# Altium PCB connectors.PcbDoc
Units mil, origin at the board's own origin, x right, y up, seen from the top; angles counter-clockwise.
Board outline 1165 x 1770 mil, 2 copper layers (Top Layer, Bottom Layer); 14 components, 5 nets, 28 pads, 0 vias.
Unrouted connection lines stored in the file: 11.
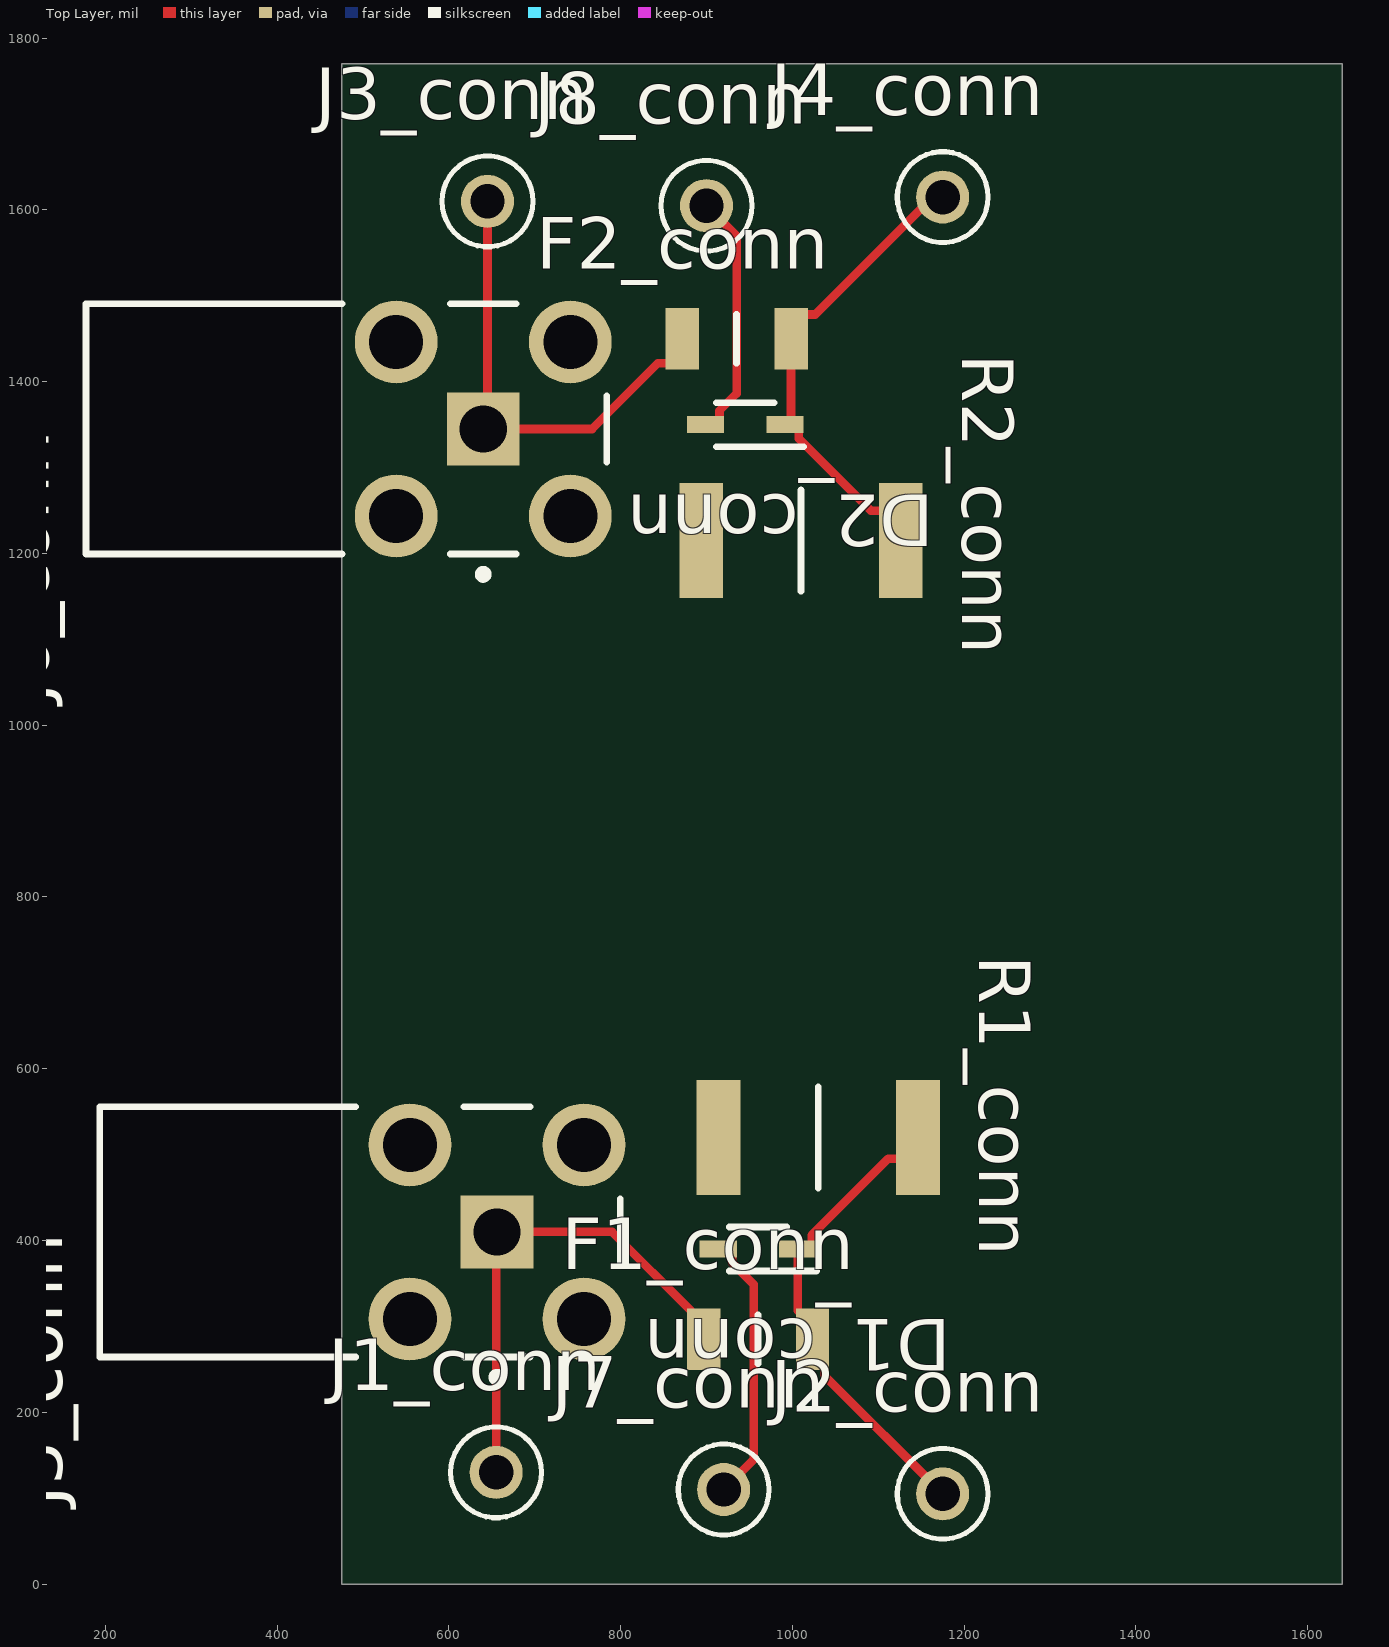
[diagram p0: Top Layer view]
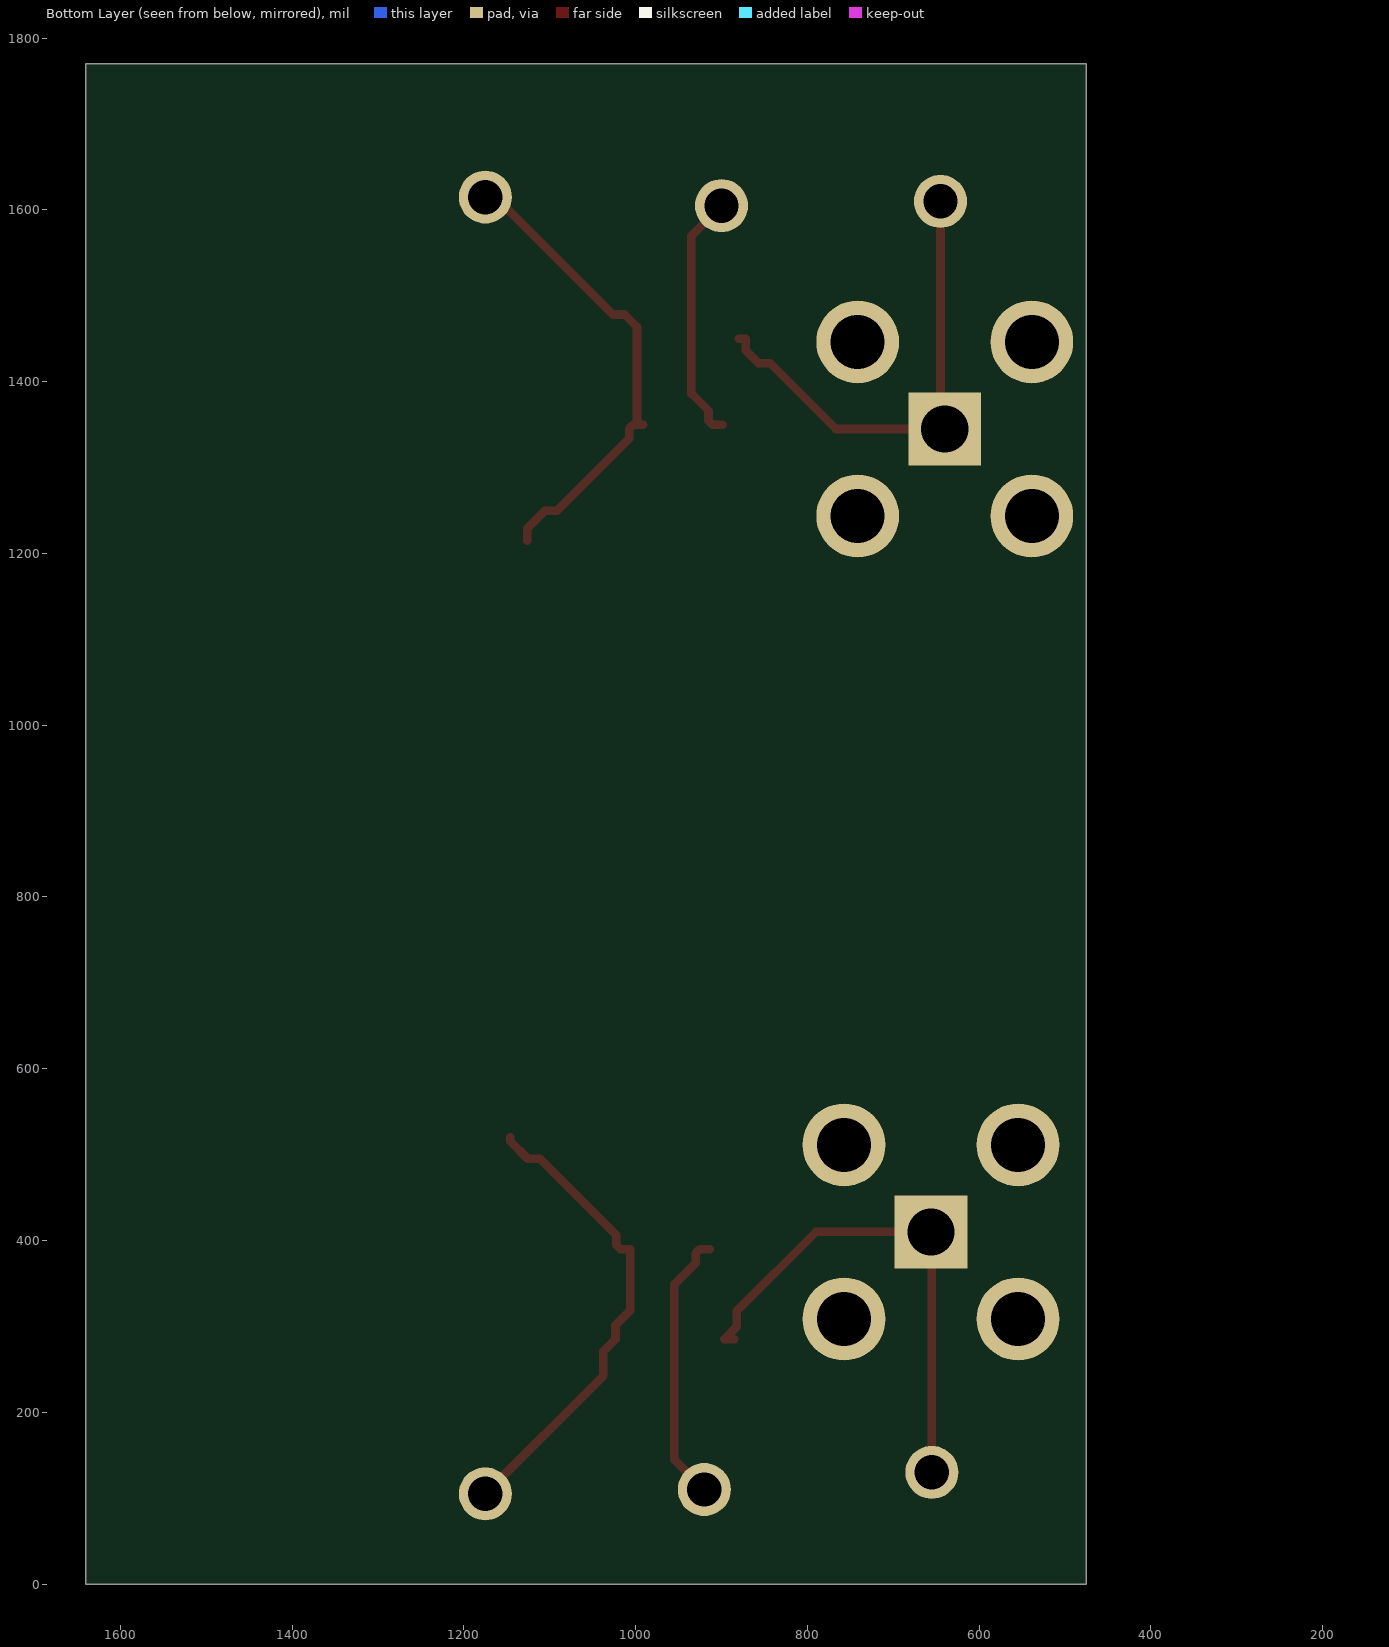
[diagram p1: Bottom Layer view, seen from below]
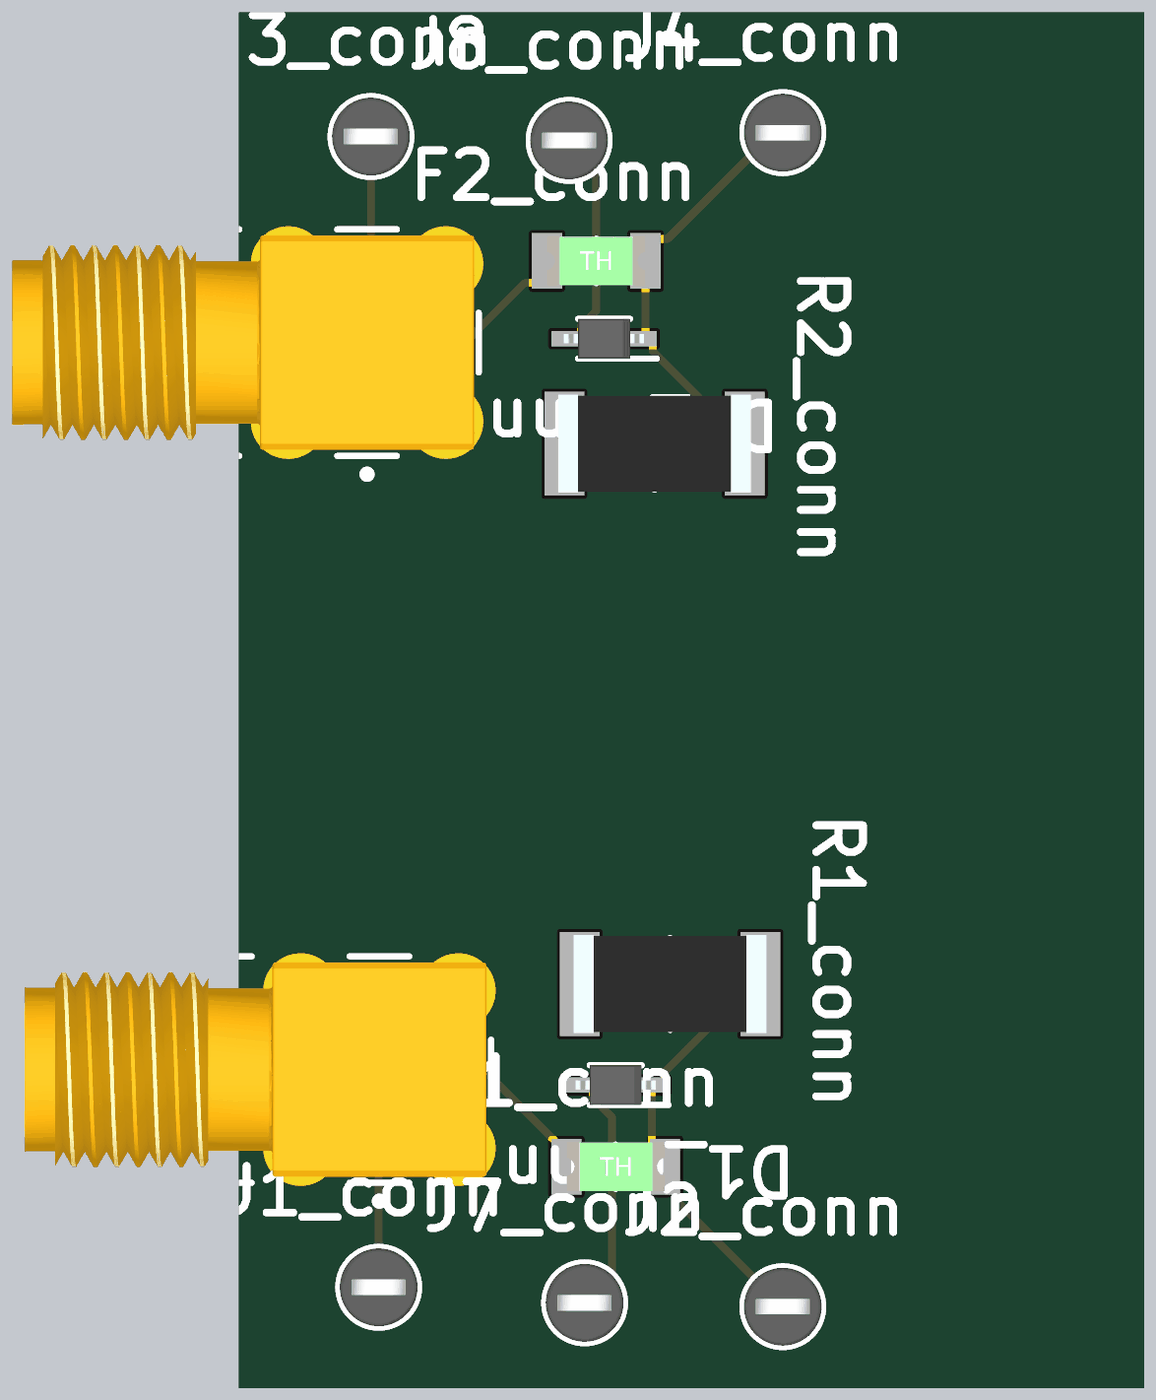
[diagram p2: 3D render of the assembled board from above, using the file's embedded part models]

## Layer stack, top to bottom
Top Solder: solder mask 0.4, Solder Resist, Dk 3.5
Top Layer: signal copper 1.4
Dielectric 1: dielectric 12.6, FR-4, Dk 4.8
Bottom Layer: signal copper 1.4
Bottom Solder: solder mask 0.4, Solder Resist, Dk 3.5

## Board outline
475,0 475,1770 1640,1770 1640,0

## Design rules (kind name [scope] priority, off if disabled: settings)
Clearance [All] p1: gap=10 ignorepadtopadclearanceinfootprint=FALSE except(0: Arc-Hole Track-Hole SMDPad-Hole THPad-Hole Via-Hole Fill-Hole Poly-Hole Region-Hole Text-Hole)
PolygonConnect [All] p1: connectstyle=Relief reliefconductorwidth=10 reliefentries=4 polygonreliefangle="90 Angle" airgapwidth=10
RoutingVias [All] p1: holewidth=28 width=50 viastyle="Through Hole" minholewidth=28 minwidth=50 maxholewidth=28 maxwidth=50
SolderMaskExpansion [All] p1: expansion=4 istentingtop=FALSE
Width [All] p1: maxlimit=10 minlimit=10 preferedwidth=10
30 further rules are at their usual default settings.

## Components (designator, comment, footprint, x,y, rotation, side; value= is the part's Value field where it differs from the comment)
D1_conn "AQW05C-01FTG" SOD2613X100N 960,390 r180 top
D2_conn "AQW05C-01FTG" SOD2613X100N 945,1350 r180 top
F1_conn "PTS120660V005" FUSC3216X90N 960,285 r0 top
F2_conn "PTS120660V005" FUSC3216X90N 935,1450 r0 top
J1_conn "5001" FP-5001-MFG 655,130 r0 top
J2_conn "5001" FP-5001-MFG 1175,105 r0 top
J3_conn "5001" FP-5001-MFG 645,1610 r0 top
J4_conn "5001" FP-5001-MFG 1175,1615 r0 top
J5_conn "PCB.SMAFRA.HT" FP-PCB_SMAFRA_HT-MFG 496.48,410 r90 top
J6_conn "PCB.SMAFRA.HT" FP-PCB_SMAFRA_HT-MFG 480.55,1345 r90 top
J7_conn "5001" FP-5001-MFG 920,110 r0 top
J8_conn "5001" FP-5001-MFG 900,1605 r0 top
R1_conn "50" RESC6332X65N 1030,520 r0 top
R2_conn "50" RESC6332X65N 1010,1215 r0 top

## Footprints (in the part's own frame and the unit in brackets; to place one, negate y for a bottom-side part, rotate by r counter-clockwise, add the part's x,y. Pads: shape width x height; smd on the part's side, far side on the other; paste and mask are expansions set on the pad)
FP-5001-MFG [mm]
  round 1.57 hole 1.016 paste-2539.97 mask+0: 1(0,0)
  silkscreen extent -1.35,-1.34 1.35,1.34, body extent -1.45,-1.45 1.45,1.45, height 0.25
FP-PCB_SMAFRA_HT-MFG [mm]
  rect 2.15x2.15 hole 1.4 paste-2539.97 mask+0: 1(0,-4.05)
  round 2.45 hole 1.6 paste-2539.97 mask+0: 2(-2.575,-1.475) 3(2.575,-1.475) 4(-2.575,-6.625) 5(2.575,-6.625)
  silkscreen extent -4.42,-7.7 3.7,7.7, body extent -3.9,-7.95 3.9,7.8, height 0.25
FUSC3216X90N [mm]
  rect 0.99x1.82 smd: 1(-1.61,0) 2(1.61,0)
  silkscreen extent 0,-0.72 0,0.72, body extent -1.6,-0.8 1.6,0.8, height 0.71
RESC6332X65N [mm]
  rect 1.3x3.4 smd: 1(-2.95,0) 2(2.95,0)
  silkscreen extent 0,-1.5 0,1.5, body extent -3.15,-1.6 3.15,1.6, height 0.65
SOD2613X100N [mm]
  rect 1.1x0.5 smd: 1(-1.175,0) 2(1.175,0)
  silkscreen extent -1.73,-0.65 0.85,0.65, body extent -1.31,-0.65 1.31,0.65, height 1

## Part data
D1_conn D2_conn: "TVS Diode (Bi-directional)", Manufacturer_Name=LITTELFUSE, Mouser Part Number=576-AQW05C-01FTG, Datasheet Link=https://www.littelfuse.com/media?resourcetype=datasheets&itemid=80ae0bbb-a157-46a1-97eb-84c82c82e9e5&filename=littelfuse-tvs-diode-array-aqw05c-01ftg-datasheet, Height=1mm, Manufacturer_Part_Number=AQW05C-01FTG, Mouser Price/Stock=https://www.mouser.co.uk/ProductDetail/Littelfuse/AQW05C-01FTG?qs=Z%252BL2brAPG1JHH8XKoKQPyw%3D%3D
F1_conn F2_conn: "Fuse", Manufacturer_Name=Eaton, Mouser Part Number=504-PTS120660V005, Arrow Part Number=PTS120660V005, Arrow Price/Stock=https://www.arrow.com/en/products/pts120660v005/eaton?region=europe, Datasheet Link=https://in.element14.com/eaton-bussmann-series/pts120660v005/pptc-resettable-fuse-0-05a-60vdc/dp/2929344?srsltid=AfmBOorX1B25_1GKuczfUlW7ilxwoZgl3KmxHJmMFzJpoWYAJ50DmC3S, Height=0.9mm, Manufacturer_Part_Number=PTS120660V005, Mouser Price/Stock=https://www.mouser.co.uk/ProductDetail/Eaton-Electronics/PTS120660V005?qs=QmibqUXyDhQPirhmCJ6OpQ%3D%3D
J1_conn J2_conn J3_conn J4_conn J7_conn J8_conn: library part CMP-2000-05181-2, "PC TEST POINT MINIATURE BLACK", Color=Black, Flammability Rating="UL94 V-0", Package Quantity=100, Body Material=Bronze, Contact Material=Bronze, Contact Plating=Silver, Diameter=2.54mm, Height=0.3inch, Hole Diameter=1.6mm, Housing Color=Black, Inside Diameter=1.27mm, Insulation=Insulated, Insulation Material=Nylon, Lead Free="Lead Free", Length=7.62mm, Material=Nylon, Mount="Through Hole", Number of Contacts=1, Number of Ports=1, Orientation=Straight, Outside Diameter=2.54mm, Packaging=Bulk, Plating=Silver, REACH SVHC="No SVHC", RoHS Compliant=Yes, Series=THM, Termination="Through Hole"
J5_conn J6_conn: library part CMP-111093-000003-1, "CONN SMA JACK R/A 50OHM PCB", Case/Package=SMA, Dielectric Material=PTFE, Frequency=6GHz, Housing Color=Gold, Operating Frequency="0 to 6 GHz", Package Quantity=500, Voltage Rating=500V, Body Material=Brass, Body Plating=Gold, Center Contact Plating=Gold, Connector Type=SMA, Contact Material=Brass, Contact Plating=Gold, Fastening Type=Threaded, Impedance=50R, Max Frequency=6GHz, Mount="Through Hole", Number of Ports=1, Orientation="Right Angle", Packaging=Tray, Series=-, Termination=Solder
R1_conn R2_conn: library part RNCL2512FT50R0, "Resistor", Manufacturer_Name="Stackpole Electronics", Datasheet Link=https://www.seielect.com/catalog/sei-rncl.pdf, Height=0.65mm, Manufacturer_Part_Number=RNCL2512FT50R0, Resistance=50

## Nets (pads, with @x,y where several pads share a name; then routed paths per layer and width w, separated by ;. In a path a pad name is that pad's centre, name@x,y a point inside that pad or via, vN(x,y) a via of type N, cw(c..) or ccw(c..) an arc to the next point about the centre after c; other vN are vias at no path point)
GND: D1_conn.2 D2_conn.2 J5_conn.2 J5_conn.3 J5_conn.4 J5_conn.5 J6_conn.2 J6_conn.3 J6_conn.4 J6_conn.5 J7_conn.1 J8_conn.1 R1_conn.1 R2_conn.1 | length 609.6
  Top Layer w10: D2_conn.2 910.25,1350 915.09,1354.84 915.09,1366.35 935,1386.26 935,1570 J8_conn.1 ; D1_conn.2 925.25,390 930.09,385.16 930.09,373.65 955,348.74 955,145 J7_conn.1
NetD1_conn_1: D1_conn.1 F1_conn.2 J2_conn.1 R1_conn.2 | length 557.9
  Top Layer w10: R1_conn.2 1146.14,515.74 1125.55,495.15 1111.41,495.15 1022.61,406.35 1022.61,394.84 1017.77,390 D1_conn.1 1006.26,318.46 1023.39,301.34 F1_conn.2 1037.46,270.93 1037.46,242.54 J2_conn.1
NetD2_conn_1: D2_conn.1 F2_conn.2 J4_conn.1 R2_conn.2 | length 560.9
  Top Layer w10: D2_conn.1 D2_conn.1@993.54,1350 ; R2_conn.2 1126.14,1229.14 1105.55,1249.73 1091.41,1249.73 1007.56,1333.59 1007.56,1345.16 1002.71,1350 D2_conn.1@993.54,1350 ; J4_conn.1 1163.39,1615 1026.65,1478.26 1012.87,1478.26 998.39,1463.78 F2_conn.2 998.39,1354.84 D2_conn.1@993.54,1350
NetF1_conn_1: F1_conn.1 J1_conn.1 J5_conn.1 | length 595.2
  Top Layer w10: J1_conn.1 655,409.07 J5_conn.1 790,410 882.13,317.87 882.13,299.49 F1_conn.1 F1_conn.1@885,285
NetF2_conn_1: F2_conn.1 J3_conn.1 J6_conn.1 | length 558.6
  Top Layer w10: J3_conn.1 645,1350 J6_conn.1 766.61,1345 843.35,1421.74 857.13,1421.74 871.61,1436.22 F2_conn.1 F2_conn.1@880,1450